# Altium PCB PCB_weed_robot_vet6 _New copy_2022-03-17.pcbdoc
Units mil, origin at the board's own origin, x right, y up, seen from the top; angles counter-clockwise.
Board outline 5245.25 x 5144.47 mil, 2 copper layers (Top Layer, Bottom Layer); 38 components, 112 nets, 231 pads, 14 vias.
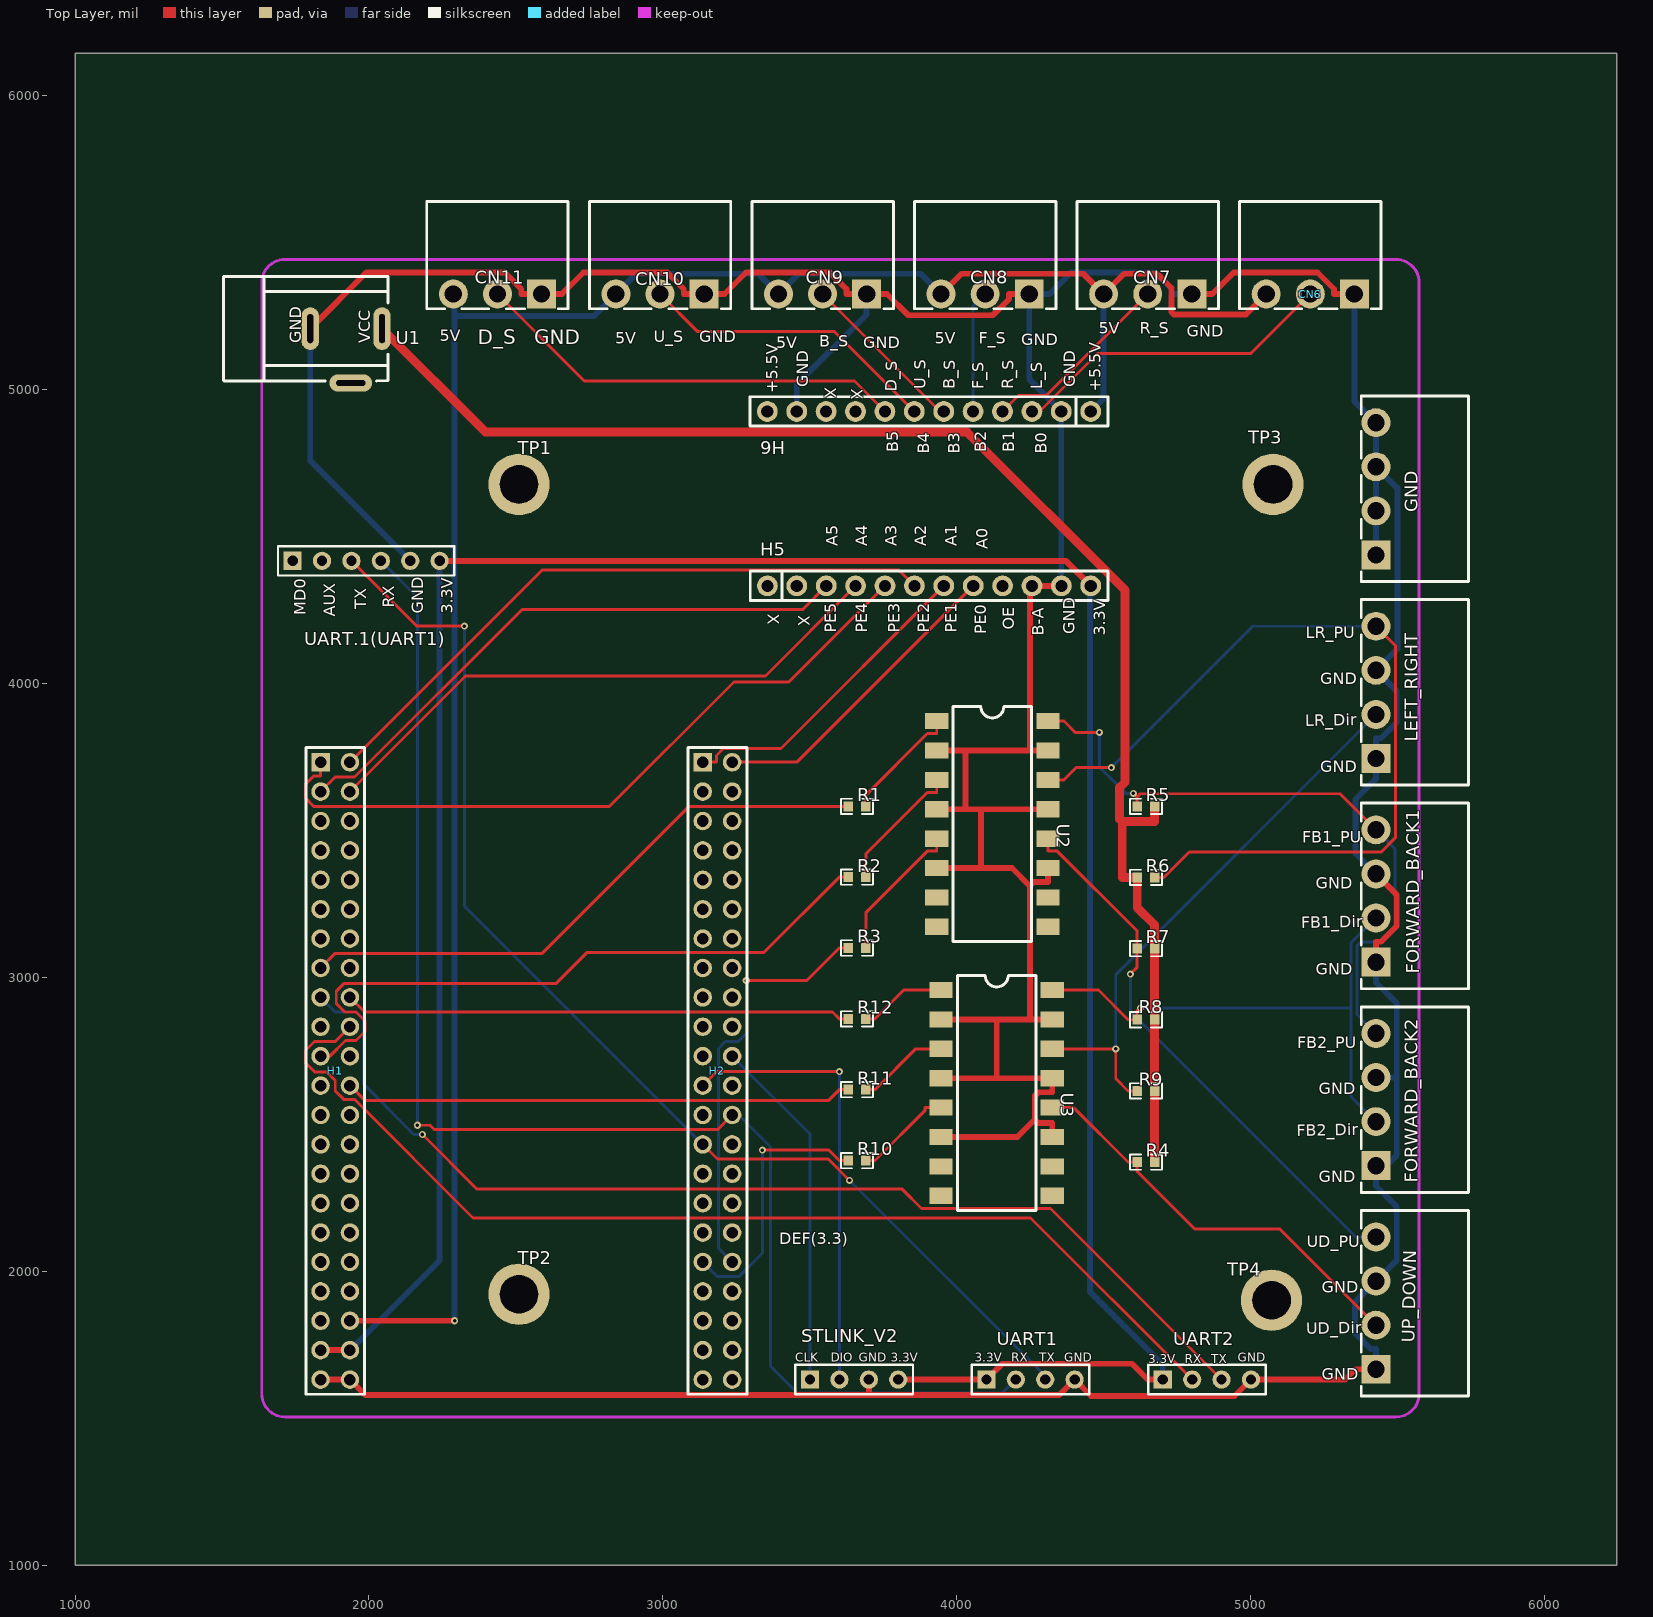
[diagram p0: Top Layer view]
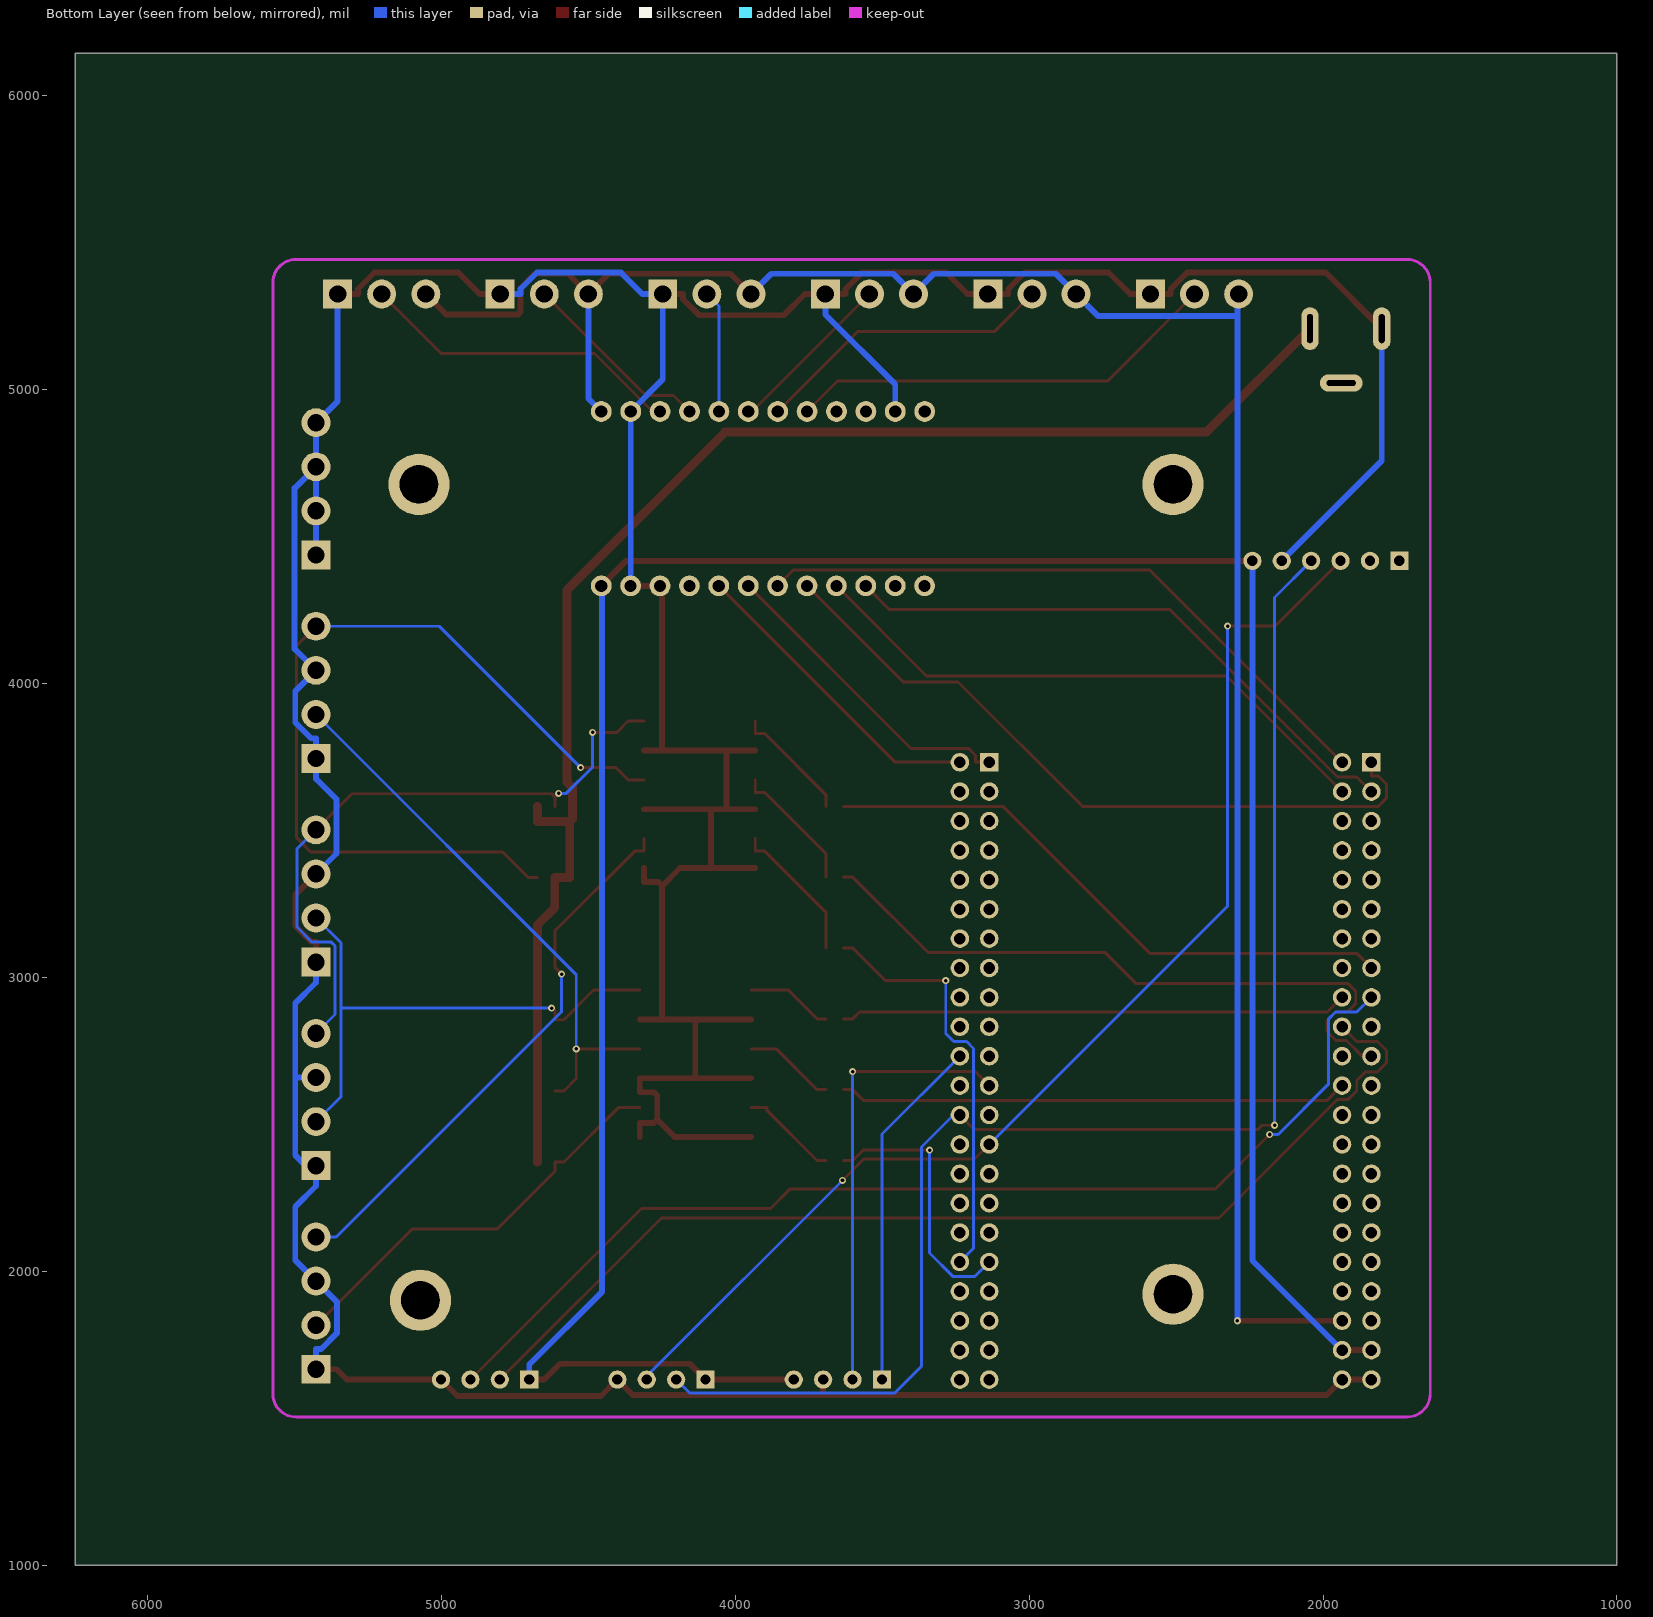
[diagram p1: Bottom Layer view, seen from below]

## Layer stack, top to bottom
Top Layer: signal copper (thickness not stored)
Dielectric: dielectric 12.6, FR-4, Dk 4.8
Bottom Layer: signal copper (thickness not stored)

## Board outline
6245.25,1000 1000,1000 1000,6144.47 6245.25,6144.47

## Components (designator, comment, footprint, x,y, rotation, side; value= is the part's Value field where it differs from the comment)
CN6 "15ETYRC-3.81-03P-14-00AH" CONN-TH_15ETYRC-3.81-03P-14-00AH 5201.99,5324.51 r180 top
CN7 "15ETYRC-3.81-03P-14-00AH" CONN-TH_15ETYRC-3.81-03P-14-00AH 4648.98,5324.48 r180 top
CN8 "15ETYRC-3.81-03P-14-00AH" CONN-TH_15ETYRC-3.81-03P-14-00AH 4095.99,5324.48 r180 top
CN9 "15ETYRC-3.81-03P-14-00AH" CONN-TH_15ETYRC-3.81-03P-14-00AH 3542.99,5324.48 r180 top
CN10 "15ETYRC-3.81-03P-14-00AH" CONN-TH_15ETYRC-3.81-03P-14-00AH 2989.99,5324.48 r180 top
CN11 "15ETYRC-3.81-03P-14-00AH" CONN-TH_15ETYRC-3.81-03P-14-00AH 2436.99,5324.48 r180 top
FORWARD_BACK1 "15ETYRC-3.81-04P-14-00AH" CONN-TH_15ETYRC-3.81-04P-14-00AH 5425.29,3277.01 r90 top
FORWARD_BACK2 "15ETYRC-3.81-04P-14-00AH" CONN-TH_15ETYRC-3.81-04P-14-00AH 5425.29,2584.51 r90 top
GND "15ETYRC-3.81-04P-14-00AH" CONN-TH_15ETYRC-3.81-04P-14-00AH 5425.29,4662.01 r90 top
H1 "X5521FV-2X22C70D30-1000" HDR-TH_44P-P2.54-V-F-R2-C22-S2.54 1885.29,2682.01 r270 top
H2 "从5" HDR-TH_44P-P2.54-V-F-R2-C22-S2.54 3185.29,2682.01 r270 top
H5 "2185B-112SSNCUNT1" HDR-TH_12P-P2.54-V-F 3905.29,4332.01 r0 top
H6 "2185B-112SSNCUNT1" HDR-TH_12P-P2.54-V-F 3904.99,4925.26 r180 top
LEFT_RIGHT "15ETYRC-3.81-04P-14-00AH" CONN-TH_15ETYRC-3.81-04P-14-00AH 5425.29,3969.51 r90 top
R1 "220Ω" R0603 3660.29,3582.01 r0 top
R2 "220Ω" R0603 3660.29,3341.01 r0 top
R3 "220Ω" R0603 3660.29,3100.01 r0 top
R4 "1k" R0603 4642.79,2372.01 r0 top
R5 "1k" R0603 4642.79,3582.01 r0 top
R6 "1k" R0603 4642.79,3340.01 r0 top
R7 "1k" R0603 4642.79,3098.01 r0 top
R8 "1k" R0603 4642.79,2856.01 r0 top
R9 "1k" R0603 4642.79,2614.01 r180 top
R10 "220Ω" R0603 3660.29,2377.01 r0 top
R11 "220Ω" R0603 3660.29,2618.01 r0 top
R12 "220Ω" R0603 3660.29,2859.01 r0 top
STLINK_V2 "HDR-M-2.54_1x4" HDR-M-2.54_1X4 3650.29,1632.01 r0 top
TP1 "M3铜柱" M3铜柱 2510.29,4677.01 r0 top
TP2 "M3铜柱" M3铜柱 2510.29,1922.01 r0 top
TP3 "M3铜柱" M3铜柱 5075.29,4677.01 r0 top
TP4 "M3铜柱" M3铜柱 5070.29,1902.01 r0 top
U1 "DC电源插座DC5.5-2.1" DC电源插座5.5-2.1 1800.29,5207.01 r0 top
U2 "TLP521-4GBSM" OPTO-SMD-16_L20.0-W6.5-P2.54-LS10.2-BL 4120.29,3522.01 r270 top
U3 "TLP521-4GBSM" OPTO-SMD-16_L20.0-W6.5-P2.54-LS10.2-BL 4135.29,2607.01 r270 top
UART1 "HDR-M-2.54_1x4" HDR-M-2.54_1X4 4250.29,1632.01 r0 top
UART2 "HDR-M-2.54_1x4" HDR-M-2.54_1X4 4850.29,1632.01 r0 top
UART.1(UART1) "HDR-F-2.54_1x6" HDR-F-2.54_1X6 1940.29,4417.01 r0 top
UP_DOWN "15ETYRC-3.81-04P-14-00AH" CONN-TH_15ETYRC-3.81-04P-14-00AH 5425.29,1892.01 r90 top

## Footprints (in the part's own frame and the unit in brackets; to place one, negate y for a bottom-side part, rotate by r counter-clockwise, add the part's x,y. Pads: shape width x height; smd on the part's side, far side on the other; paste and mask are expansions set on the pad)
CONN-TH_15ETYRC-3.81-03P-14-00AH [mm]
  rect 2.5x2.5 hole 1.5: 1(-3.81,0)
  round 2.5 hole 1.5: 2(0,0) 3(3.81,0)
  silkscreen extent -6.11,-8 6.11,1.27
CONN-TH_15ETYRC-3.81-04P-14-00AH [mm]
  rect 2.5x2.5 hole 1.5: 1(-5.715,0)
  round 2.5 hole 1.5: 2(-1.905,0) 3(1.905,0) 4(5.715,0)
  silkscreen extent -8.01,-8 8.01,1.27
DC电源插座5.5-2.1 [mm]
  oval 1.5x3.7 hole 0.5 slot 2.5 at 90 deg: 1(6.2,0) 2(0,0)
  oval 3.7x1.5 hole 0.5 slot 2.5 at 0 deg: 3(3.5,-4.7)
  silkscreen extent -7.5,-4.51 6.7,4.51
HDR-F-2.54_1X6 [mil]
  rect 62x62 hole 35: 1(-200,0)
  round 62 hole 35: 2(-100,0) 3(0,0) 4(100,0) 5(200,0) 6(300,0)
  silkscreen extent -250,-50 350,50
HDR-M-2.54_1X4 [mil]
  rect 62x62 hole 35: 1(-150,0)
  round 62 hole 35: 2(-50,0) 3(50,0) 4(150,0)
  silkscreen extent -200,-50 200,50
HDR-TH_12P-P2.54-V-F [mm]
  round 1.8 hole 1.05: 1(-13.97,0) 2(-11.43,0) 3(-8.89,0) 4(-6.35,0) 5(-3.81,0) 6(-1.27,0) 7(1.27,0) 8(3.81,0) 9(6.35,0) 10(8.89,0) 11(11.43,0) 12(13.97,0)
  silkscreen extent -15.45,-1.27 15.45,1.27
HDR-TH_44P-P2.54-V-F-R2-C22-S2.54 [mm]
  rect 1.6x1.6 hole 1: 1(-26.67,-1.27)
  round 1.6 hole 1: 2(-26.67,1.27) 3(-24.13,-1.27) 4(-24.13,1.27) 5(-21.59,-1.27) 6(-21.59,1.27) 7(-19.05,-1.27) 8(-19.05,1.27) 9(-16.51,-1.27) 10(-16.51,1.27) 11(-13.97,-1.27) 12(-13.97,1.27) 13(-11.43,-1.27) 14(-11.43,1.27) 15(-8.89,-1.27) 16(-8.89,1.27) 17(-6.35,-1.27) 18(-6.35,1.27) 19(-3.81,-1.27) 20(-3.81,1.27) 21(-1.27,-1.27) 22(-1.27,1.27) 23(1.27,-1.27) 24(1.27,1.27) 25(3.81,-1.27) 26(3.81,1.27) 27(6.35,-1.27) 28(6.35,1.27) 29(8.89,-1.27) 30(8.89,1.27) 31(11.43,-1.27) 32(11.43,1.27) 33(13.97,-1.27) 34(13.97,1.27) 35(16.51,-1.27) 36(16.51,1.27) 37(19.05,-1.27) 38(19.05,1.27) 39(21.59,-1.27) 40(21.59,1.27) 41(24.13,-1.27) 42(24.13,1.27) 43(26.67,-1.27) 44(26.67,1.27)
  silkscreen extent -27.94,-2.54 27.94,2.54
M3铜柱 [mil]
  round 208.66 hole 129.92 slot 130.12 at 0 deg: 1(0,0)
OPTO-SMD-16_L20.0-W6.5-P2.54-LS10.2-BL [mil]
  rect 55.1x78.74 smd: 1(-350,-189) 2(-250,-189) 3(-150,-189) 4(-50,-189) 5(50,-189) 6(150,-189) 7(250,-189) 8(350,-189) 9(350,189) 10(250,189) 11(150,189) 12(50,189) 13(-50,189) 14(-150,189) 15(-250,189) 16(-350,189)
  silkscreen extent -400,-134 400,134
R0603 [mil]
  rect 31.75x34.02 smd: 1(-29.66,0) 2(29.65,0)
  silkscreen extent -55,-26 55,26

## Via types
v1: diameter 24, hole 12, Top Layer to Bottom Layer, tented both sides, 14 vias

## Nets (pads, with @x,y where several pads share a name; then routed paths per layer and width w, separated by ;. In a path a pad name is that pad's centre, name@x,y a point inside that pad or via, vN(x,y) a via of type N, cw(c..) or ccw(c..) an arc to the next point about the centre after c; other vN are vias at no path point)
3.3V: H1.41 H1.42 H5.12 STLINK_V2.4 UART1.1 UART2.1 UART.1(UART1).6 | length 8910.1
  Top Layer w20: H1.41 H1.42 ; 2240.29,4417.01 4370.29,4417.01 H5.12 ; STLINK_V2.4 UART1.1 4153.96,1685.68 4595.61,1685.68 4649.28,1632.01 UART2.1
  Bottom Layer w20: H1.42 2240.29,2037.01 2240.29,4417.01 ; H5.12 4452.14,4328.86 4452.14,1931.17 4700.29,1683.02 UART2.1
+5.5V: H6.12
+5V: CN6.3 CN7.3 CN8.3 CN9.3 CN10.3 CN11.3 H1.40 H6.1 | length 7394
  Top Layer w20: H1.40 v1(2291.36,1832.01) ; CN8.3 4015.29,5393.78 4429.69,5393.78 CN7.3 4568.29,5393.78 4680.89,5393.78 4729.7,5344.97 4729.7,5263.36 4737.87,5255.19 4982.67,5255.19 CN6.3
  Bottom Layer w20: CN11.3 2291.36,5320.11 2291.36,5250.25 ; v1(2291.36,1832.01) 2291.36,5250.25 ; CN8.3 3876.69,5393.78 3462.29,5393.78 CN9.3 3323.69,5393.78 2909.29,5393.78 CN10.3 2765.76,5250.25 2291.36,5250.25 ; H6.1 4498.99,4969.26 CN7.3
+7.4V: R4.2 R5.2 R6.1 R7.2 R8.2 R9.1 U1.1 | length 5090.7
  Top Layer w30: U1.1 2396.6,4854.81 4034.27,4854.81 4572.2,4316.88 4572.2,3664.73 4553.14,3645.67 4553.14,3539.1 4562.25,3529.99 ; R4.2 R9.1 R8.2 4672.45,2908.03 R7.2 4672.45,3178.25 4613.13,3237.57 R6.1 4562.25,3340.01 4562.25,3529.99 ; R5.2 4672.45,3529.99 4562.25,3529.99
AUX: UART.1(UART1).2
B_SIGN: CN9.2 H6.6 | length 577.4
  Top Layer w10: CN9.2 3942.21,4925.26 H6.6
D_SIGN: CN11.2 H6.8 | length 1483.4
  Top Layer w10: CN11.2 2732.36,5029.11 3651.14,5029.11 H6.8
F_SIGN: CN8.2 H6.5 | length 416.2
  Bottom Layer w10: H6.5 4054.99,5283.48 CN8.2
FB_DIR: FORWARD_BACK1.2 FORWARD_BACK2.2 R8.1 U3.16 | length 1856.1
  Top Layer w10: U3.16 4481.17,2957.01 4582.17,2856.01 R8.1 4613.13,2888.11 4616.41,2888.11 v1(4624.09,2895.79)
  Bottom Layer w10: v1(4624.09,2895.79) 5340.87,2895.79 ; FORWARD_BACK2.2 5340.87,2593.93 5340.87,2895.79 ; FORWARD_BACK1.2 5340.87,3117.59 5340.87,2895.79
FB_PU: FORWARD_BACK1.4 FORWARD_BACK2.4 R5.1 U2.16 | length 2216.4
  Top Layer w10: U2.16 4363.75,3872.01 4402.51,3833.25 v1(4484.21,3833.25) ; v1(4600.15,3626.2) 4601.04,3626.2 4613.13,3614.11 ; R5.1 4613.13,3614.11 ; FORWARD_BACK1.4 5302.63,3624.67 4623.69,3624.67 4613.13,3614.11
  Bottom Layer w10: v1(4484.21,3833.25) 4484.21,3716 4574.01,3626.2 v1(4600.15,3626.2) ; FORWARD_BACK2.4 5360.99,2873.81 5360.99,3107.47 5373.41,3119.89 5438.77,3119.89 5489.96,3171.08 5489.96,3437.34 FORWARD_BACK1.4
GND: CN6.1 CN7.1 CN8.1 CN9.1 CN10.1 CN11.1 FORWARD_BACK1.1 FORWARD_BACK1.3 FORWARD_BACK2.1 FORWARD_BACK2.3 GND.1 GND.2 GND.3 GND.4 H1.43 H1.44 H5.10 H5.11 H6.2 H6.11 LEFT_RIGHT.1 LEFT_RIGHT.3 STLINK_V2.3 U1.2 U2.2 U2.4 U2.6 U2.11 U2.13 U2.15 U3.2 U3.4 U3.6 U3.11 U3.13 U3.15 UART1.4 UART2.4 UART.1(UART1).5 UP_DOWN.1 UP_DOWN.3 | length 19105.1
  Top Layer w20: U1.2 1991.07,5397.79 2461.76,5397.79 2517.77,5341.78 2517.77,5324.48 CN11.1 2656.21,5324.48 2729.52,5397.79 3014.76,5397.79 3070.77,5341.78 3070.77,5324.48 3105.38,5324.48 CN10.1 3209.21,5324.48 3282.52,5397.79 3567.76,5397.79 3623.77,5341.78 3623.77,5324.48 3658.38,5324.48 CN9.1 3762.21,5324.48 3834.42,5252.27 4121.86,5252.27 4176.77,5307.18 4176.77,5324.48 CN8.1 ; H1.43 H1.44 1987.72,1579.58 3700.29,1579.58 ; STLINK_V2.3 3700.29,1579.58 ; U2.6 4081.41,3372.01 ; U2.4 4028.57,3572.01 ; U2.2 4028.57,3772.01 ; U3.6 4205.39,2457.01 4264.84,2516.46 ; U3.4 4135.29,2657.01 ; U3.2 4135.29,2857.01 ; U2.11 4309.29,3324.45 4261.73,3324.45 4248.19,3310.91 ; U2.13 4081.41,3572.01 ; U2.15 4248.5,3772.01 ; U3.11 4324.29,2504.57 4276.73,2504.57 4264.84,2516.46 ; U3.15 4248.19,2857.01 ; H5.11 H5.10 4248.5,4325.22 4248.5,3772.01 ; CN7.1 4868.21,5324.48 4941.54,5397.81 5226.77,5397.81 5282.77,5341.81 5282.77,5324.51 CN6.1 ; UP_DOWN.1 5356.07,1667.01 5321.07,1632.01 UART2.4 4944.23,1575.95 4456.35,1575.95 UART1.4 4347.86,1579.58 3700.29,1579.58 ; FORWARD_BACK1.1 5425.29,3121.23 5442.59,3121.23 5495.91,3174.55 5495.91,3281.39 FORWARD_BACK1.3 ; 4028.57,3572.01 4028.57,3772.01 ; 4028.57,3572.01 4081.41,3572.01 ; 4028.57,3772.01 4248.5,3772.01 ; 4081.41,3372.01 4081.41,3572.01 ; 4081.41,3372.01 4187.09,3372.01 4248.19,3310.91 ; 4135.29,2657.01 4135.29,2857.01 ; 4135.29,2657.01 U3.13 4324.29,2609.45 4276.73,2609.45 4264.84,2597.56 4264.84,2516.46 ; 4135.29,2857.01 4248.19,2857.01 ; 4248.19,2857.01 4248.19,3310.91
  Bottom Layer w20: U1.2 1800.29,4757.01 2140.29,4417.01 ; H6.11 3454.99,5017.26 3692.99,5255.26 CN9.1 ; H5.11 4354.99,4332.31 H6.2 4245.99,5034.26 CN8.1 4315.21,5324.48 4388.52,5397.79 4673.76,5397.79 4729.77,5341.78 4729.77,5324.48 CN7.1 ; CN6.1 5351.99,4960.31 GND.4 GND.3 ; UP_DOWN.1 5425.29,1736.23 5407.98,1736.23 5354.67,1789.54 5354.67,1896.39 UP_DOWN.3 5496.13,2037.85 5496.13,2219.45 5425.29,2290.29 FORWARD_BACK2.1@5425.29,2324.9 ; FORWARD_BACK2.1 FORWARD_BACK2.1@5425.29,2324.9 ; FORWARD_BACK2.3 5495.91,2659.51 ; FORWARD_BACK1.1 5425.29,2982.79 5495.91,2912.17 5495.91,2659.51 ; FORWARD_BACK1.3 5355.88,3421.42 5355.88,3605.88 5425.29,3675.29 LEFT_RIGHT.1 5425.29,3813.73 5442.59,3813.73 5495.91,3867.05 5495.91,3973.89 LEFT_RIGHT.3 5498.04,4117.26 5498.04,4664.26 GND.3 ; GND.1 GND.2 GND.3 ; FORWARD_BACK2.1@5425.29,2324.9 5495.91,2395.52 5495.91,2659.51
L_SIGN: CN6.2 H6.3 | length 1112.4
  Top Layer w10: H6.3 4280.88,4925.26 4477.68,5122.06 4999.54,5122.06 CN6.2
LR_DIR: LEFT_RIGHT.2 R9.2 U3.14 | length 1911.4
  Top Layer w10: U3.14 v1(4540.14,2757.01) 4540.14,2656.04 4582.17,2614.01 R9.2
  Bottom Layer w10: v1(4540.14,2757.01) 4540.14,3009.36 LEFT_RIGHT.2
LR_PU: LEFT_RIGHT.4 R6.2 U2.14 | length 2953.9
  Top Layer w10: U2.14 4363.75,3672.01 4405.08,3713.34 v1(4525.19,3713.34) ; R6.2 4703.41,3340.01 4790.41,3427.01 5443.29,3427.01 5491.09,3474.81 5491.09,4128.71 LEFT_RIGHT.4
  Bottom Layer w10: v1(4525.19,3713.34) 5006.36,4194.51 LEFT_RIGHT.4
MD0: UART.1(UART1).1
NRST: H1.9
PA0: H1.15 R1.1 | length 2023.2
  Top Layer w10: H1.15 1885.29,3082.01 2589.27,3082.01 3089.27,3582.01 R1.1
PA1: H1.18 R12.1 | length 1725.6
  Top Layer w10: H1.18 1985.29,2882.01 3576.67,2882.01 3599.67,2859.01 R12.1
PA2: H1.17 UART2.3 | length 3733.3
  Top Layer w10: v1(2181.76,2465.65) 2367.89,2279.52 3814.21,2279.52 3879.37,2214.36 4317.94,2214.36 UART2.3
  Bottom Layer w10: H1.17 1885.29,2882.01 1957.74,2882.01 1981.89,2857.86 1981.89,2636.29 2152.53,2465.65 v1(2181.76,2465.65)
PA3: H1.20 UART2.2 | length 3709.5
  Top Layer w10: H1.20 1885.29,2782.01 1814.65,2782.01 1784.19,2751.55 1784.19,2709.77 1815.35,2678.61 1856.12,2678.61 1885.29,2649.44 1885.29,2613.92 1913.8,2585.41 1950.62,2585.41 2354,2182.03 4250.27,2182.03 UART2.2
PA4: H1.19
PA5: H1.22
PA6: H1.21 R2.1 | length 2288
  Top Layer w10: H1.21 1866.57,2732.01 1919.97,2785.41 1955.39,2785.41 1986.4,2816.42 1986.4,2851.55 1955.94,2882.01 1917.86,2882.01 1888.69,2911.18 1888.69,2952.84 1914.46,2978.61 2635.3,2978.61 2742.1,3085.41 3344.07,3085.41 3599.67,3341.01 R2.1
PA7: H1.24 R11.1 | length 1731
  Top Layer w10: H1.24 1985.29,2582.01 3563.67,2582.01 3599.67,2618.01 R11.1
PA8: H2.28
PA9: H2.27 UART1.3 UART.1(UART1).3 | length 4078
  Top Layer w10: 1940.29,4417.01 2162.38,4194.92 v1(2324.19,4194.92) ; H2.27 3185.29,2382.01 3561.98,2382.01 v1(3634.53,2309.46)
  Bottom Layer w10: v1(2324.19,4194.92) 2324.19,3243.11 H2.27 ; v1(3634.53,2309.46) 4300.29,1643.7 UART1.3
PA10: H2.26 UART1.2 UART.1(UART1).4 | length 4881.7
  Top Layer w10: v1(2164.89,2497.18) 2207.64,2497.18 2222.79,2482.03 3185.31,2482.03 H2.26
  Bottom Layer w10: 2040.29,4417.01 2164.89,4292.41 v1(2164.89,2497.18) ; H2.26 3256.83,2532.01 3365.36,2423.48 3365.36,1677.67 3457.12,1585.91 4154.19,1585.91 UART1.2
PA11: H2.25
PA12: H2.24
PA13: H2.23 STLINK_V2.2 | length 1532.3
  Top Layer w10: H2.23 3182.9,2679.62 v1(3600.28,2679.62)
  Bottom Layer w10: STLINK_V2.2 v1(3600.28,2679.62)
PA14: H2.22 STLINK_V2.1 | length 1209.8
  Bottom Layer w10: H2.22 3500.29,2467.01 STLINK_V2.1
PA15: H2.21
PB0: H1.25
PB1: H1.28
PB2: H1.27
PB3: H2.9
PB4: H2.8
PB5: H2.7
PB6: H2.6
PB7: H2.5
PB8: H2.4
PB9: H2.3
PB10: H1.37
PB11: H1.39
PB12: H2.44
PB13: H2.43
PB14: H2.42
PB15: H2.41
PC0: H1.12
PC1: H1.11
PC2: H1.14
PC3: H1.13
PC4: H1.23
PC5: H1.26
PC6: H2.32
PC7: H2.31
PC8: H2.30
PC9: H2.29
PC10: H2.20
PC11: H2.19
PC12: H2.18
PC13: H1.8
PC14: H1.7
PC15: H1.10
PD0: H2.17
PD1: H2.16
PD2: H2.15
PD3: H2.14
PD4: H2.13
PD5: H2.12
PD6: H2.11
PD7: H2.10
PD8: H2.40
PD9: H2.39
PD10: H2.38
PD11: H2.37
PD12: H2.36 R3.1 | length 1434.3
  Top Layer w10: v1(3283.3,2988.93) 3488.59,2988.93 3599.67,3100.01 R3.1
  Bottom Layer w10: H2.36 3188.69,2078.61 3188.69,2758.47 3212.23,2782.01 3255.77,2782.01 3283.3,2809.54 v1(3283.3,2988.93)
PD13: H2.35 R10.1 | length 913.7
  Top Layer w10: v1(3338.27,2412.25) 3564.43,2412.25 3599.67,2377.01 R10.1
  Bottom Layer w10: H2.35 3185.29,1982.01 3257.74,1982.01 3338.27,2062.54 v1(3338.27,2412.25)
PD14: H2.34
PD15: H2.33
PE0: H2.2 H5.8 | length 1068.5
  Top Layer w10: H2.2 3455.29,3732.01 H5.8
PE1: H2.1 H5.7 | length 1082.2
  Top Layer w10: H2.1 3181.88,3732.01 3181.88,3755.31 3205.17,3778.6 3401.88,3778.6 H5.7
PE2: H1.2 H5.6 | length 2213.7
  Top Layer w10: H1.2 2589.83,4386.55 3800.75,4386.55 H5.6
PE3: H1.1 H5.5 | length 2450.3
  Top Layer w10: H1.1 1835.29,3685.42 1812,3685.42 1784.52,3657.94 1784.52,3609.07 1811.58,3582.01 2818.53,3582.01 3241.48,4004.96 3428.24,4004.96 H5.5
PE4: H1.4 H5.4 | length 2009.9
  Top Layer w10: H1.4 2328.35,4025.07 3348.35,4025.07 H5.4
PE5: H1.3 H5.3 | length 2009.9
  Top Layer w10: H1.3 1885.29,3682.01 1951.18,3682.01 2520.14,4250.97 3474.25,4250.97 H5.3
PE6: H1.6
PE7: H1.30
PE8: H1.29
PE9: H1.32
PE10: H1.31
PE11: H1.34
PE12: H1.33
PE13: H1.36
PE14: H1.35
PE15: H1.38
R10_2: R10.2 U3.5 | length 336.2
  Top Layer w10: R10.2 3720.91,2377.01 3891.83,2547.93 3891.83,2557.01 U3.5
R11_2: R11.2 U3.3 | length 313.9
  Top Layer w10: R11.2 3720.91,2618.01 3859.91,2757.01 U3.3
R12_2: R12.2 U3.1 | length 296.9
  Top Layer w10: R12.2 3720.91,2859.01 3818.91,2957.01 U3.1
R_SIGN: CN7.2 H6.4 | length 659.4
  Top Layer w10: H6.4 4209.36,4979.63 4304.14,4979.63 CN7.2
TP1_1: TP1.1
TP2_1: TP2.1
TP3_1: TP3.1
TP4_1: TP4.1
U2_1: R1.2 U2.1 | length 408.7
  Top Layer w10: R1.2 3689.95,3620.01 3899.31,3829.37 3931.29,3829.37 U2.1
U2_3: R2.2 U2.3 | length 449.7
  Top Layer w10: R2.2 3689.95,3420.01 3899.31,3629.37 3931.29,3629.37 U2.3
U2_5: R3.2 U2.5 | length 490.7
  Top Layer w10: R3.2 3689.95,3220.01 3899.31,3429.37 3931.29,3429.37 U2.5
U_SIGN: CN10.2 H6.7 | length 1030.4
  Top Layer w10: CN10.2 3118.01,5196.46 3583.79,5196.46 H6.7
UD_DIR: R4.1 U3.12 UP_DOWN.2 | length 1426.3
  Top Layer w10: U3.12 4397.17,2557.01 4582.17,2372.01 R4.1 4613.13,2339.91 4809.08,2143.96 5098.34,2143.96 UP_DOWN.2
UD_PU: R7.1 U2.12 UP_DOWN.4 | length 1895.4
  Top Layer w10: U2.12 4309.29,3429.37 4341.27,3429.37 4613.13,3157.51 R7.1 4613.13,3034.48 v1(4589.92,3011.27)
  Bottom Layer w10: v1(4589.92,3011.27) 4589.92,2883.83 5356.74,2117.01 UP_DOWN.4
VB: H1.5
VR+: H1.16
pads on no net: H5.1 H5.2 H5.9 H6.9 H6.10 U1.3 U2.7 U2.8 U2.9 U2.10 U3.7 U3.8 U3.9 U3.10

## Keep-outs
Keep-Out Layer:
  lines w10: 1635.29,1583.74 ccw(c1714.03,1583.74) 1714.03,1505 ; 1635.29,5363.27 cw(c1714.03,5363.27) 1714.03,5442.01 ; 5493.55,1505 ccw(c5493.55,1583.74) 5572.29,1583.74 ; 5493.55,5442.01 cw(c5493.55,5363.27) 5572.29,5363.27

## Silkscreen, mask and mechanical layers (free items; w line width, h text height)
Top Overlay:
  text "5V" at 4481.99,5189.79 h39.37
  text "R_S" at 4621.99,5189.79 h39.37
  text "GND" at 4781.99,5179.79 h39.37
  text "5V" at 2239.99,5164.79 h39.37
  text "U_S" at 2967.99,5159.79 h39.37
  text "GND" at 3122.99,5159.79 h39.37
  text "5V" at 2837.99,5154.79 h39.37
  text "5V" at 3923.99,5154.79 h39.37
  text "F_S" at 4073.99,5154.79 h39.37
  text "D_S" at 2369.99,5154.48 h50
  text "GND" at 2561.99,5154.48 h50
  text "GND" at 4218.99,5149.79 h39.37
  text "B_S" at 3530.99,5144.79 h39.37
  text "5V" at 3385.99,5139.79 h39.37
  text "GND" at 3680.99,5139.79 h39.37
  text "GND" at 3494.97,5007.01 h39.37 r90
  text "X" at 3550.6,5007.01 h39.37 r270
  text "GND" at 4401.99,5007.01 h39.37 r90
  text "X" at 3640.6,5002.01 h39.37 r270
  text "U_S" at 3893.95,5001.11 h39.37 r90
  text "B_S" at 3992.93,5000.76 h39.37 r89
  text "F_S" at 4091.91,5001.11 h39.37 r90
  text "R_S" at 4190.98,5000.76 h39.37 r89
  text "L_S" at 4289.97,5001.11 h39.37 r90
  text "D_S" at 3794.97,4991.66 h39.37 r89
  text "+5.5V" at 4489.97,4992.01 h39.37 r90
  text "+5.5V" at 3389.97,4987.01 h39.37 r90
  text "B5" at 3799.97,4787.01 h39.37 r90
  text "B2" at 4099.97,4787.01 h39.37 r90
  text "B1" at 4194.97,4787.01 h39.37 r90
  text "B4" at 3904.97,4782.01 h39.37 r90
  text "B3" at 4009.97,4782.01 h39.37 r90
  text "B0" at 4304.97,4782.01 h39.37 r90
  text "A5" at 3594.97,4467.01 h39.37 r90
  text "A4" at 3694.97,4467.01 h39.37 r90
  text "A3" at 3794.97,4467.01 h39.37 r90
  text "A2" at 3894.97,4467.01 h39.37 r90
  text "A1" at 3999.97,4467.01 h39.37 r90
  text "A0" at 4104.97,4457.01 h39.37 r90
  text "RX" at 2085.29,4257.01 h40 r90
  text "TX" at 1990.29,4252.01 h40 r90
  text "GND" at 2185.29,4237.01 h40 r90
  text "3.3V" at 2285.29,4237.01 h40 r90
  text "X" at 3355.6,4237.01 h39.37 r270
  text "MD0" at 1785.29,4232.01 h40 r90
  text "X" at 3460.6,4232.01 h39.37 r270
  text "AUX" at 1885.29,4227.01 h40 r90
  text "OE" at 4194.97,4182.01 h39.37 r90
  text "PE5" at 3589.97,4172.01 h39.37 r90
  text "PE4" at 3694.97,4172.01 h39.37 r90
  text "PE3" at 3804.97,4172.01 h39.37 r90
  text "PE2" at 3904.97,4172.01 h39.37 r90
  text "PE1" at 3999.97,4172.01 h39.37 r90
  text "PE0" at 4099.97,4167.01 h39.37 r90
  text "GND" at 4399.97,4167.01 h39.37 r90
  text "B-A" at 4294.97,4162.01 h39.37 r90
  text "3.3V" at 4504.97,4162.01 h39.37 r90
  text "LR_PU" at 5187.34,4153.55 h39.37
  text "GND" at 5235.29,3997.32 h39.37
  text "LR_Dir" at 5184.73,3854.79 h39.37 r1
  text "GND" at 5235.29,3698.55 h39.37
  text "FB1_PU" at 5175.29,3457.32 h39.37
  text "GND" at 5220.54,3301.52 h39.37
  text "FB1_Dir" at 5170.63,3167.33 h39.37 r1
  text "GND" at 5220.54,3009.42 h39.37
  text "FB2_PU" at 5157.79,2758.55 h39.37
  text "GND" at 5230.29,2602.32 h39.37
  text "FB2_Dir" at 5155.18,2459.79 h39.37 r1
  text "GND" at 5230.29,2303.55 h39.37
  text "DEF(3.3)" at 3395.29,2092.32 h39.37
  text "UD_PU" at 5190.04,2081.89 h39.37
  text "GND" at 5240.29,1927.32 h39.37
  text "UD_Dir" at 5187.43,1786.47 h39.37 r1
  text "CLK" at 3450.29,1692.01 h30
  text "DIO" at 3570.29,1692.01 h30
  text "GND" at 3665.29,1692.01 h30
  text "3.3V" at 3775.29,1692.01 h30
  text "3.3V" at 4060.29,1692.01 h30
  text "RX" at 4185.29,1692.01 h30
  text "TX" at 4280.29,1692.01 h30
  text "GND" at 4365.29,1692.01 h30
  text "GND" at 4955.29,1692.01 h30
  text "3.3V" at 4650.29,1687.01 h30
  text "RX" at 4775.29,1687.01 h30
  text "TX" at 4865.29,1687.01 h30
  text "GND" at 5240.29,1631.89 h39.37

## Text inside footprints (layer, text, board x,y; h text height)
U1: Top Overlay "GND" at 1769.97,5157.01 h39.37 r90; Top Overlay "VCC" at 2004.97,5157.01 h39.37 r90